# EAGLE board espcam (tugas nanang) (EAGLE 7.5.0)
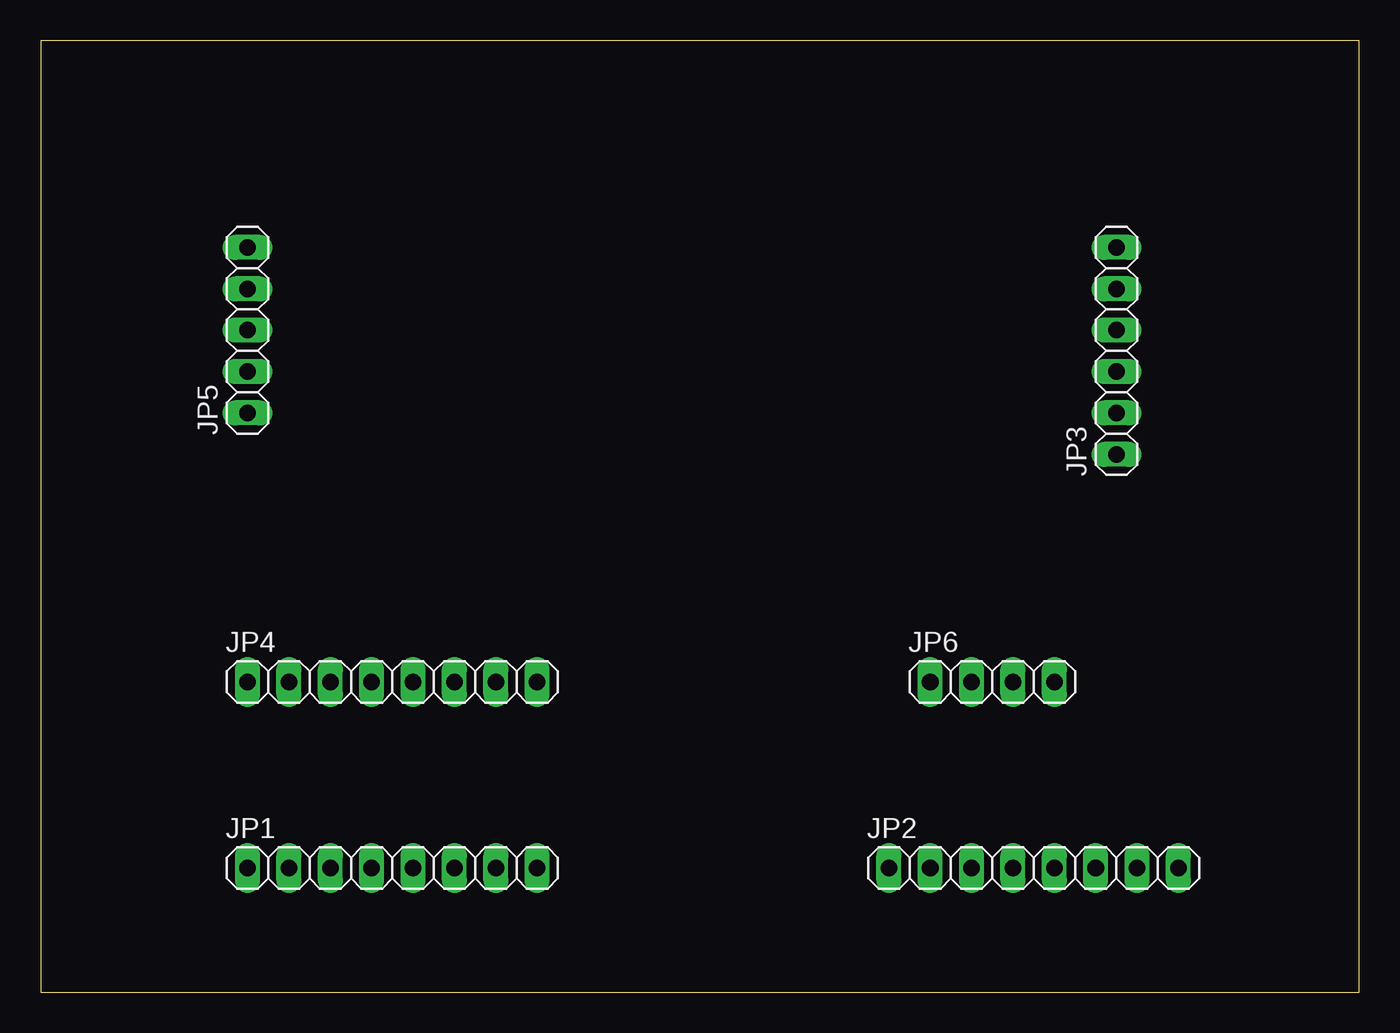
[diagram p0: board, top side]
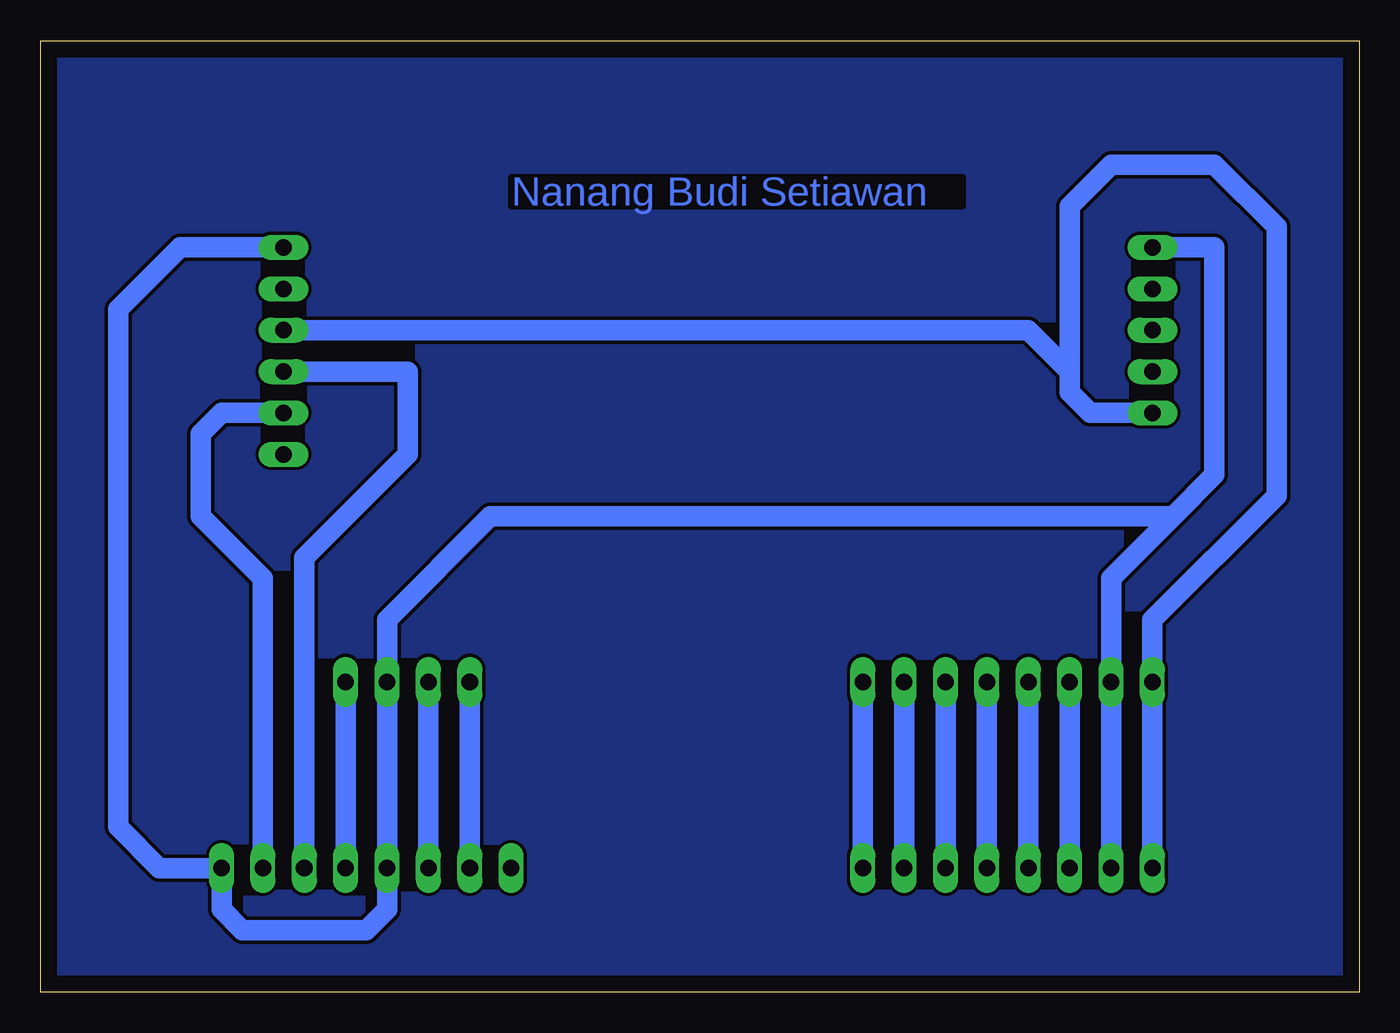
[diagram p1: board, bottom side, seen from below]

Size 80.95 x 58.41 mm. Coordinates in mm from the lower left corner, seen from the top.
Outline: 0,0 80.95,0 80.95,58.41 0,58.41 0,0
Copper layers (1*16): Top 0.035mm / dielectric 1.5mm / Bottom 0.035mm
Design rules "default": minimum track width 10mil, minimum drill 24mil, track to track 8mil, track to pad 8mil, pad to pad 8mil, via to via 8mil, smd to smd 8mil, copper to edge 40mil, drill to drill 8mil, minimum pad ring 10mil, minimum via ring 8mil, stop-mask expansion 4mil, vias tented up to drill 0mil, thermal gap 10mil

## Footprints (pad centres in the part's own frame; a part is rotated, then mirrored left to right if it is on the bottom)
1X08 = drill 1.016 long: 1 -8.89,0; 2 -6.35,0; 3 -3.81,0; 4 -1.27,0; 5 1.27,0; 6 3.81,0; 7 6.35,0; 8 8.89,0
1X06 = drill 1.016 long: 1 -6.35,0; 2 -3.81,0; 3 -1.27,0; 4 1.27,0; 5 3.81,0; 6 6.35,0
1X05 = drill 1.016 long: 1 -5.08,0; 2 -2.54,0; 3 0,0; 4 2.54,0; 5 5.08,0
1X04 = drill 1.016 long: 1 -3.81,0; 2 -1.27,0; 3 1.27,0; 4 3.81,0

## Placement (x,y rotation side)
JP1  [1X08]  21.59,7.62 0 top
JP2  [1X08]  60.96,7.62 0 top
JP3  [1X06]  66.04,39.37 90 top
JP4  [1X08]  21.59,19.05 0 top
JP5  [1X05]  12.7,40.64 90 top
JP6  [1X04]  58.42,19.05 0 top

## Library data of the parts
JP1-JP6 = pinhead

## Nets
3V3: JP2.1
5V: JP1.1 JP3.4 JP4.1 JP5.1
GND: JP1.2 JP2.4 JP2.8 JP3.6 JP4.2 JP5.5 JP6.3
IO0: JP2.3 JP6.2
IO2: JP1.7 JP4.7
IO4: JP1.8 JP4.8
IO12: JP1.3 JP4.3
IO13: JP1.4 JP4.4
IO14: JP1.6 JP4.6
IO15: JP1.5 JP4.5
IO16: JP2.2 JP6.1
RX: JP2.7 JP3.2
TX: JP2.6 JP3.3
VOUT: JP2.5 JP6.4

## Tracks (layer width: path | path; a pad name or v marks a point on that pad's centre or on a via)
5V
  Bottom 1.27: JP1.1 JP4.1 12.7,22.86 5.08,30.48 5.08,46.99 8.89,50.8 15.24,50.8 17.78,48.26 17.78,38.1 | 17.78,38.1 17.78,36.83 16.51,35.56 JP5.1 | JP3.4 20.32,40.64 17.78,38.1
GND
  Bottom 1.27: JP1.2 JP4.2 15.24,25.4 11.43,29.21 | 11.43,29.21 8.89,31.75 8.89,45.72 JP5.5 | 11.43,29.21 53.34,29.21 59.69,22.86 JP6.3 JP2.4 59.69,5.08 60.96,3.81 68.58,3.81 69.85,5.08 JP2.8 73.66,7.62 76.2,10.16 76.2,41.91 72.39,45.72 JP3.6
IO0
  Bottom 1.27: JP2.3 JP6.2
IO2
  Bottom 1.27: JP4.7 JP1.7
IO4
  Bottom 1.27: JP4.8 JP1.8
IO12
  Bottom 1.27: JP1.3 JP4.3
IO13
  Bottom 1.27: JP1.4 JP4.4
IO14
  Bottom 1.27: JP1.6 JP4.6
IO15
  Bottom 1.27: JP1.5 JP4.5
IO16
  Bottom 1.27: JP2.2 JP6.1
N$1
  pour Bottom: 0,58.42 81.28,58.42 81.28,0 0,0
RX
  Bottom 1.27: JP2.7 67.31,25.4 71.12,29.21 71.12,34.29 69.85,35.56 JP3.2
TX
  Bottom 1.27: JP2.6 64.77,26.67 58.42,33.02 58.42,38.1 JP3.3
VOUT
  Bottom 1.27: JP2.5 JP6.4

## Text on the board
Bottom: Nanang Budi Setiawan